# Altium PCB PCB1.PcbDoc
Units mm, origin at the board's own origin, x right, y up, seen from the top; angles counter-clockwise.
Board outline 100.08 x 40 mm, 2 copper layers (Top Layer, Bottom Layer); 15 components, 12 nets, 43 pads, 0 vias.
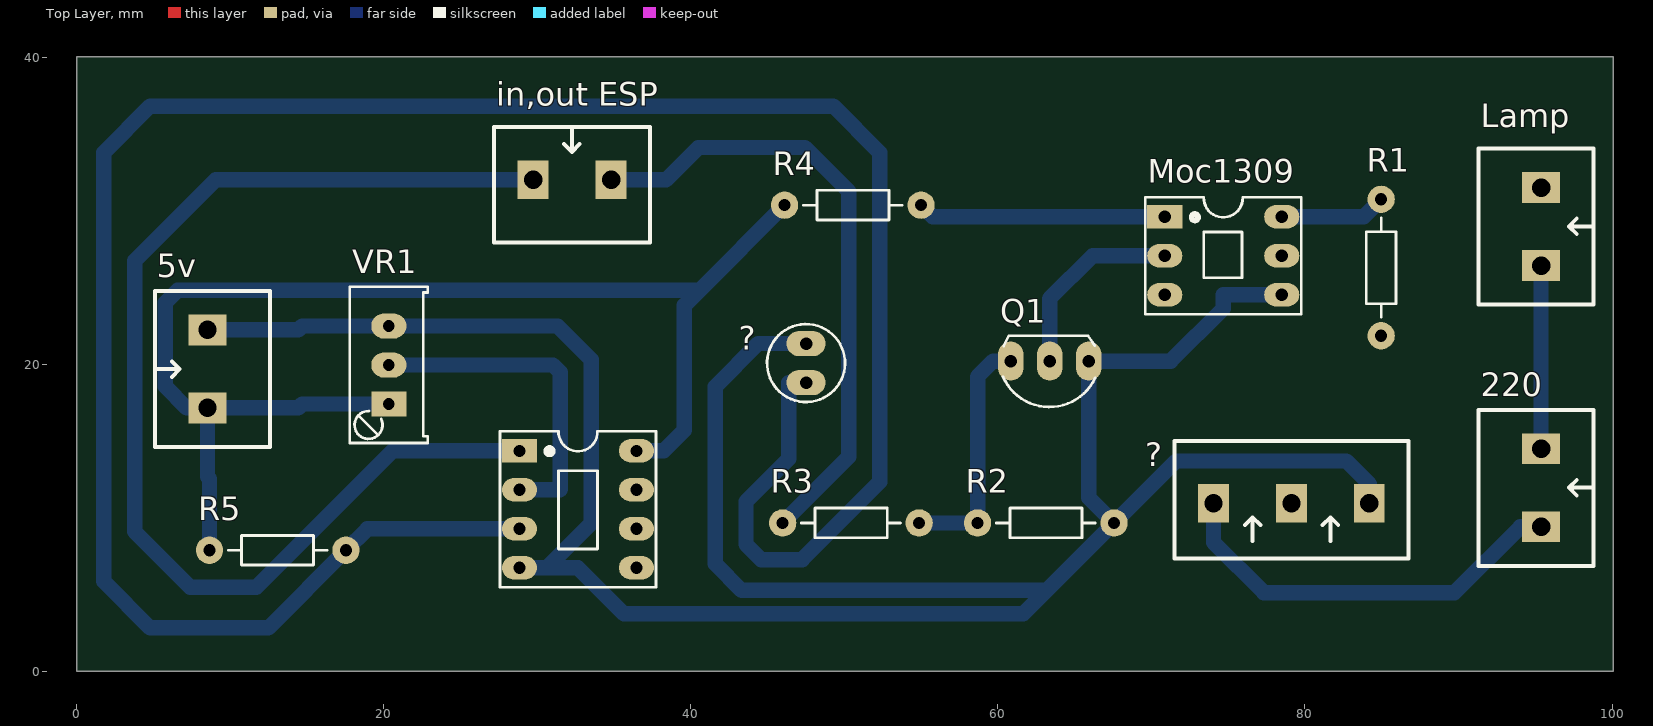
[diagram p0: Top Layer view]
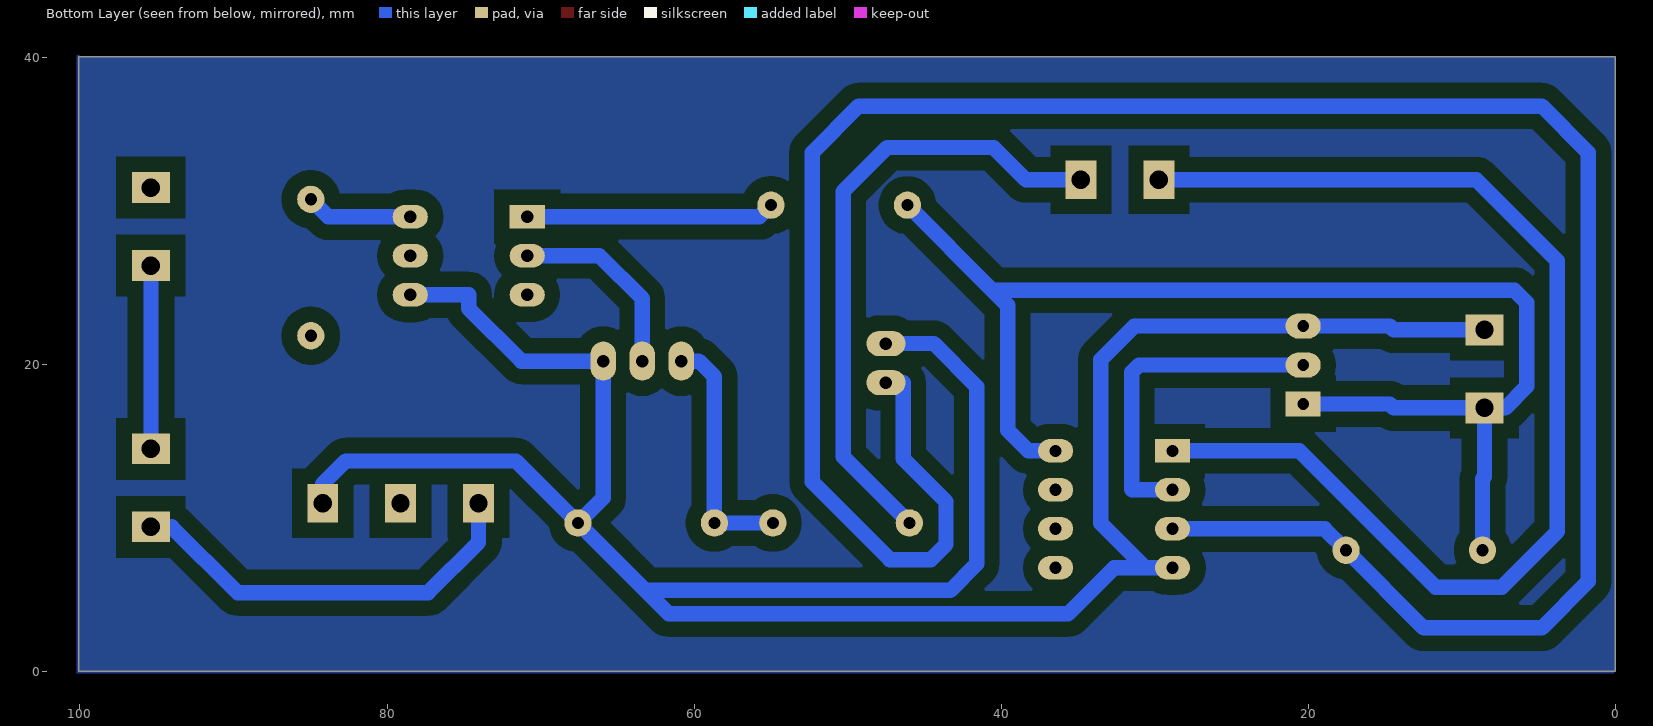
[diagram p1: Bottom Layer view, seen from below]
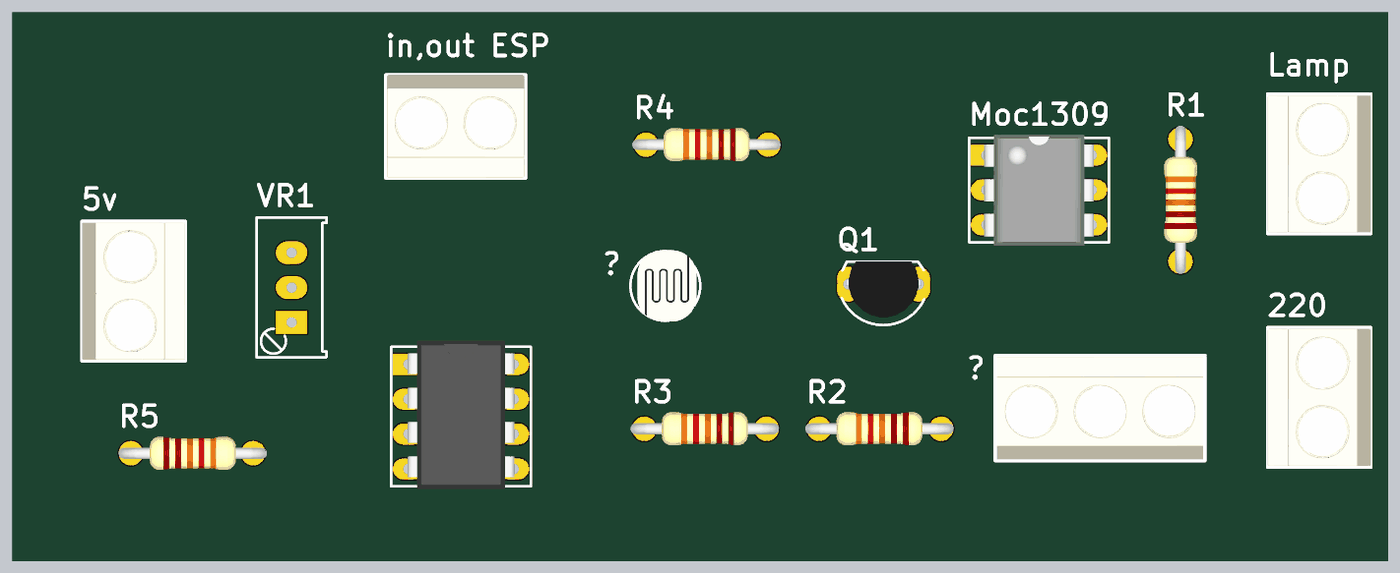
[diagram p2: 3D render of the assembled board from above, using the file's embedded part models]

## Layer stack, top to bottom
Top Solder: solder mask 0.0102, Solder Resist, Dk 3.5
Top Layer: signal copper 0.0356
Dielectric 1: dielectric 0.32, FR-4, Dk 4.8
Bottom Layer: signal copper 0.0356
Bottom Solder: solder mask 0.0102, Solder Resist, Dk 3.5

## Board outline
0,0 100.076,0 100.076,40.005 0,40.005

## Design rules (kind name [scope] priority, off if disabled: settings)
Clearance [All] p1: gap=1 ignorepadtopadclearanceinfootprint=FALSE
PolygonConnect [All] p1: connectstyle=Relief reliefconductorwidth=0.254 reliefentries=4 polygonreliefangle="90 Angle" airgapwidth=0.254
RoutingLayers [All] p1: top layer_v5=FALSE bottom layer_v5=TRUE
RoutingVias [All] p1: holewidth=0.711 width=1.27 viastyle="Through Hole" minholewidth=0.711 minwidth=1.27 maxholewidth=0.711 maxwidth=1.27
SolderMaskExpansion [All] p1: expansion=0.102 istentingtop=FALSE
Width [All] p1: maxlimit=3 minlimit=0.254 preferedwidth=1
29 further rules are at their usual default settings.

## Classes and differential pairs
component class Sheet1: 5v 220 ? "in,out ESP" Lamp Moc1309 Q1 R1 R2 R3 R4 R5 VR1

## Components (designator, comment, footprint, x,y, rotation, side; value= is the part's Value field where it differs from the comment)
5v "" "Medium - Header 2" 8.509,19.685 r90 top
220 "" "Medium - Header 2" 95.377,11.938 r270 top
? "LDR" CDS 47.498,21.336 r270 top
? "Triac 41600B" "Medium - Header 3" 74.041,10.922 r0 top
"in,out ESP" "" "Medium - Header 2" 32.258,32.004 r0 top
Lamp "" "Medium - Header 2" 95.377,28.956 r270 top
Moc1309 "" DIP6/W0.3 70.866,29.591 r270 top value=MOC3021
Q1 "C2383" QTO-92 63.373,20.193 r180 top value=C1815
R1 "1.2k" R1/4W 84.963,30.734 r270 top value="R1/4W - 1K"
R2 "100" R1/4W 58.674,9.652 r0 top value="R1/4W - 1K"
R3 "200" R1/4W 45.974,9.652 r0 top value="R1/4W - 1K"
R4 "150" R1/4W 46.101,30.353 r0 top value="R1/4W - 1K"
R5 "1k" R1/4W 17.526,7.874 r180 top value="R1/4W - 1K"
VR1 "10K" VR-S3 20.32,17.399 r90 top value="Volume 50k"
? "LM393" DIP8 32.639,10.668 r270 top value=LM358

## Footprints (in the part's own frame and the unit in brackets; to place one, negate y for a bottom-side part, rotate by r counter-clockwise, add the part's x,y. Pads: shape width x height; smd on the part's side, far side on the other; paste and mask are expansions set on the pad)
CDS [mil] "QUANG TRO"
  oval 65x100 hole 32: 1(0,0) 2(100,0)
  silkscreen extent -50,-100 150,100, body extent -53,-80 153,89, height 138
DIP6/W0.3 [mil] "6 PIN, W 300mil, Pin to pin 100mil"
  rect 60x90 hole 31.5: 1(0,0)
  oval 60x90 hole 31.5: 2(100,0) 3(200,0) 4(200,300) 5(100,300) 6(0,300)
  silkscreen extent -50,-50 250,350, body extent -58,-7 260,307, height 170
DIP8 [mil] "DIP, 8-Leads, Row Spacing 7.62mm, Pitch 2.54mm, Body 9.91x6.73mm"
  rect 60x90 hole 31: 1(-145,-150)
  oval 60x90 hole 31: 2(-45,-150) 3(55,-150) 4(155,-150) 5(155,150) 6(55,150) 7(-45,150) 8(-145,150)
  silkscreen extent -195,-200 205,200, body extent -213,-153 213,153, height 177
"Medium - Header 2" [mm]
  rect 2x2.5 hole 1.2: 1(-2.54,0) 2(2.54,0)
  silkscreen extent -5.08,-4.08 5.08,3.43, body extent -5,-4.07 5,3.43, height 10
"Medium - Header 3" [mm]
  rect 2x2.5 hole 1.2: 1(0,0) 2(5.08,0) 3(10.147,0)
  silkscreen extent -2.54,-3.58 12.7,4.06, body extent -2.42,-3.51 12.58,3.99, height 10
QTO-92 [mil] "TO-92"
  oval 66x100 hole 32: 1(-100,0) 2(0,0) 3(100,0)
  silkscreen extent -117,-65 120,118, body extent -109,-66 109,95, height 245
R1/4W [mil] "R 1/4W, 2 Pin, 350mil"
  round 70 hole 31: 1(0,0) 2(350,0)
  silkscreen extent 48,-38 302,38, body extent -40,-47 386,47, height 111
VR-S3 [mil] "Variable Resistor"
  rect 65x90 hole 30: 1(0,0)
  oval 65x90 hole 30: 2(100,0) 3(200,0)
  silkscreen extent -100,-100 301,100, body extent -91,-98 291,90, height 430

## Part data
5v 220 "in,out ESP" Lamp: library part "Header 2 - M", "Header, 2-Pin, Medium", LatestRevisionDate=17-Jul-2002, LatestRevisionNote="Re-released for DXP Platform.", Publisher="Altium Limited"
?: "Quang Tro"
?: library part "Header 3 - M", "Header, 3-Pin, Medium", LatestRevisionDate=17-Jul-2002, LatestRevisionNote="Re-released for DXP Platform.", Publisher="Altium Limited"
Moc1309: library part MOC3021, "Single Opto"
Q1: library part C1815, "NPN 600mW, ECB"
R1 R2 R3 R4 R5: library part R1/4W, "Resistor 1/4W"
VR1: library part VR-S, "Var Resistor"
?: library part LM358, "Low-Power Dual Operational Amplifier"

## Nets (pads, with @x,y where several pads share a name; then routed paths per layer and width w, separated by ;. In a path a pad name is that pad's centre, name@x,y a point inside that pad or via, vN(x,y) a via of type N, cw(c..) or ccw(c..) an arc to the next point about the centre after c; other vN are vias at no path point)
GND: 5v.2 ?.1@47.498,21.336 ?.3@84.188,10.922 ?.4 Moc1309.4 Q1.1 R2.2 VR1.3 | length 170.4
  Bottom Layer w1: 5v.2 14.427,22.225 14.681,22.479 VR1.3 31.318,22.479 33.503,20.295 33.503,9.627 30.607,6.731 ; ?.4 30.607,6.731 ; ?.1@47.498,21.336 44.379,21.336 41.585,18.542 41.585,6.985 43.307,5.263 63.175,5.263 ; Moc1309.4 74.676,24.511 74.676,23.622 71.247,20.193 Q1.1 65.913,11.303 R2.2 ; ?.3@84.188,10.922 84.188,12.192 82.69,13.691 71.603,13.691 R2.2 ; 30.607,6.731 32.639,6.731 35.636,3.734 61.646,3.734 63.175,5.263 ; 63.175,5.263 R2.2
Net5v_1: 5v.1 ?.8 R4.1 R5.2 VR1.1 | length 86.2
  Bottom Layer w1: R5.2 8.636,12.522 8.509,12.649 5v.1 ; VR1.1 14.681,17.399 14.427,17.145 5v.1 ; ?.8 38.227,14.351 39.573,15.697 39.573,23.825 40.553,24.805 ; R4.1 40.553,24.805 ; 5v.1 7.156,17.145 5.759,18.542 5.759,24.007 6.557,24.805 40.553,24.805
Net220_1: 220.1 Lamp.2 | length 11.9
  Bottom Layer w1: 220.1 Lamp.2
Net220_2: 220.2 ?.1@74.041,10.922 | length 27
  Bottom Layer w1: ?.1@74.041,10.922 74.041,8.382 77.318,5.105 89.738,5.105 94.031,9.398 220.2
Net?_2: ?.2@47.498,18.796 ?.3@28.829,9.271 R5.1 | length 157.5
  Bottom Layer w1: ?.3@28.829,9.271 18.923,9.271 R5.1 12.471,2.819 4.775,2.819 1.753,5.842 1.753,33.782 4.775,36.805 49.276,36.805 52.299,33.782 52.299,12.319 47.243,7.263 44.577,7.263 43.585,8.255 43.585,11.048 46.379,13.842 46.379,18.796 ?.2@47.498,18.796
Net_1: "in,out ESP.1" ?.1@28.829,14.351 | length 76
  Bottom Layer w1: ?.1@28.829,14.351 20.574,14.351 11.684,5.461 7.391,5.461 3.759,9.093 3.759,26.725 9.038,32.004 29.718,32.004
Net_2: ?.2@28.829,11.811 VR1.2 | length 21.7
  Bottom Layer w1: VR1.2 31.013,19.939 31.496,19.456 31.496,11.836 31.471,11.811 ?.2@28.829,11.811
"Netin,out ESP_2": "in,out ESP.2" R3.1 | length 40.9
  Bottom Layer w1: 34.798,32.004 38.379,32.004 40.488,34.112 47.422,34.112 50.292,31.242 50.292,13.97 R3.1
NetMoc1309_1: Moc1309.1 R4.2 | length 16.2
  Bottom Layer w1: R4.2 55.753,29.591 Moc1309.1
NetMoc1309_2: Moc1309.2 Q1.2 | length 12.7
  Bottom Layer w1: Q1.2 63.373,24.257 66.167,27.051 Moc1309.2
NetMoc1309_6: Moc1309.6 R1.1 | length 7
  Bottom Layer w1: Moc1309.6 83.82,29.591 R1.1
NetQ1_3: Q1.3 R2.1 R3.2 | length 15.9
  Bottom Layer w1: R3.2 R2.1 58.674,19.177 59.69,20.193 Q1.3
pads on no net: ?.2@79.121,10.922 ?.5 ?.6 ?.7 Lamp.1 Moc1309.3 Moc1309.5 R1.2

## Polygon pours and split planes (outlines as drawn)
no net on Bottom Layer "NONET_L02_P000" (solid, pour order 0): 0,0 0,40.005 99.949,40.005 100.203,40.259 100.203,-0.127 0.127,-0.127